# EAGLE board 365nm-LED-board (EAGLE 6.4)
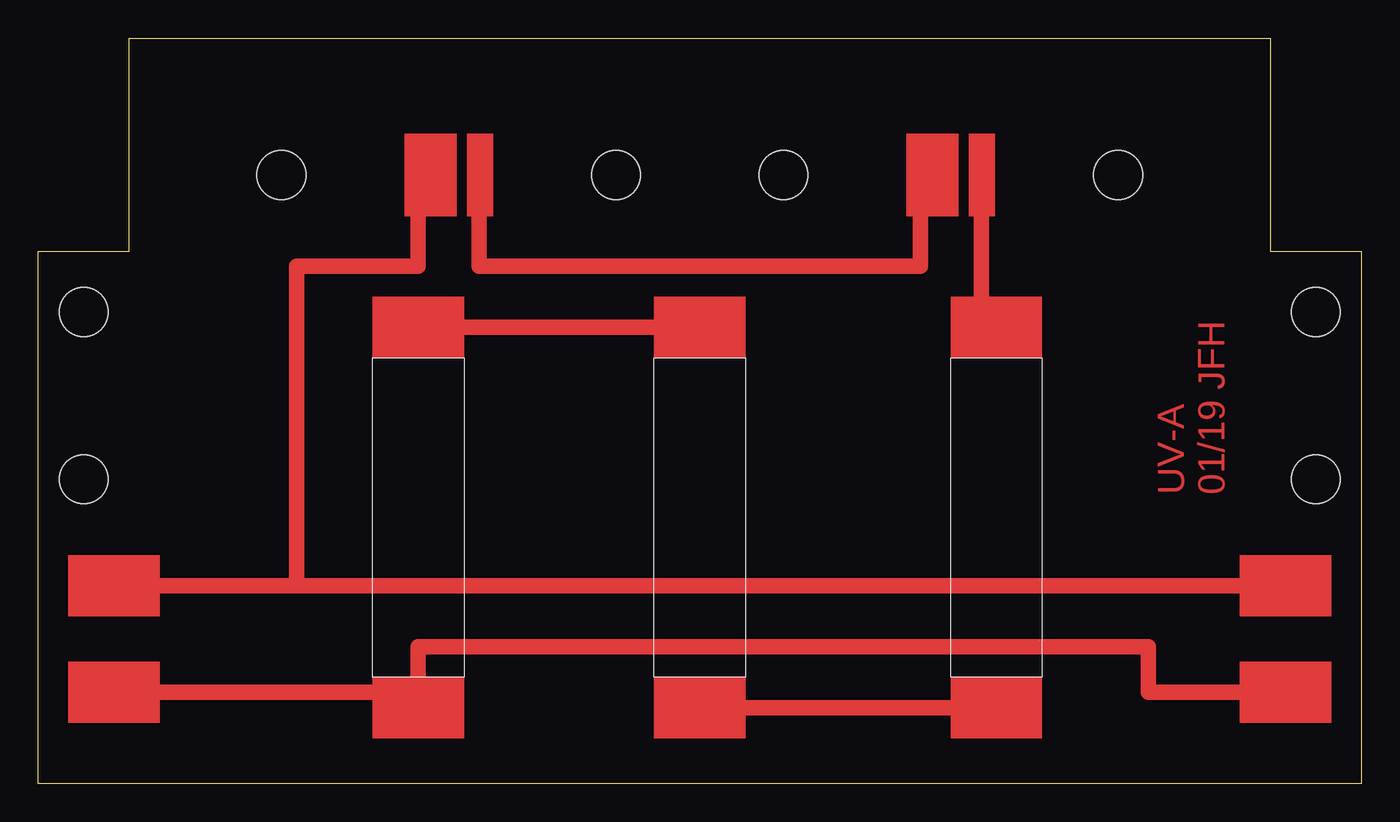
[diagram p0: board, top side]
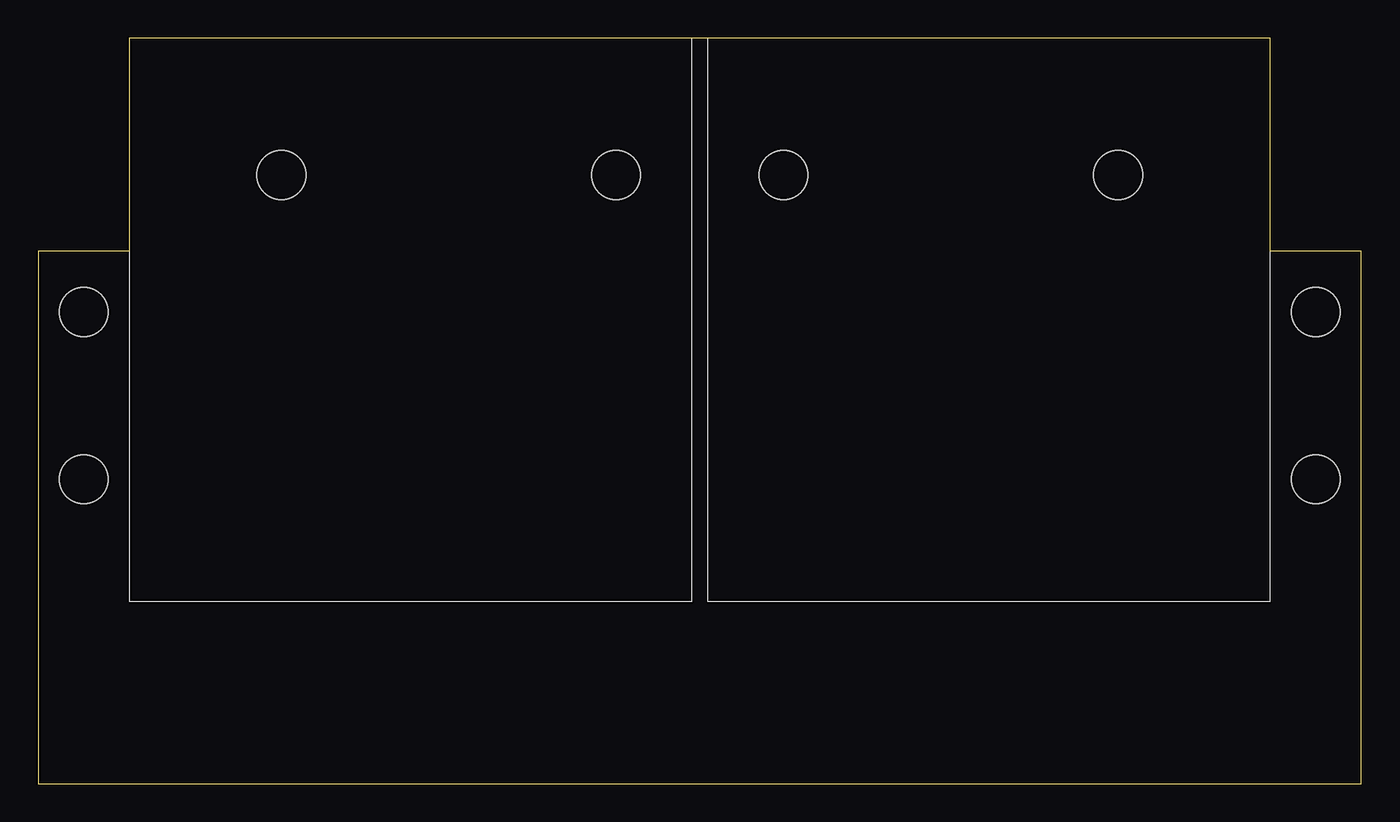
[diagram p1: board, bottom side, seen from below]

Size 87 x 49 mm. Coordinates in mm from the lower left corner, seen from the top.
Outline: 0,0 0,35 6,35 6,49 81,49 81,35 87,35 87,0 0,0
Copper layers (1*16): Top 0.035mm / dielectric 1.5mm / Bottom 0.035mm
Design rules "default": minimum track width 10mil, minimum drill 24mil, track to track 8mil, track to pad 8mil, pad to pad 8mil, via to via 8mil, smd to smd 8mil, copper to edge 40mil, drill to drill 8mil, minimum pad ring 10mil, minimum via ring 8mil, stop-mask expansion 4mil, vias tented up to drill 0mil, thermal gap 10mil
Holes 3.2 mm at 38,40 16,40 49,40 71,40 84,31 84,20 3,20 3,31

## Placement (x,y rotation side)
E$3  [LEDPKG]  60,40 0 top
E$5  [LEDPKG]  27,40 0 top

## Library data of the parts
E$3 E$5 = led

## Tracks (layer width: path | path; a pad name or v marks a point on that pad's centre or on a via)
S$1
  Top 1.016: 29,40 29,34 58,34 58,41
S$2
  Top 1.016: 25,41 25,34 17,34 17,13 | 17,13 25,13 82,13 | 17,13 5,13
S$5
  Top 1.016: 62,42 62,29
S$6  (via drill 0.6)
  other vias: 3,31
S$7  (via drill 0.6)
  other vias: 3,20
S$8  (via drill 0.6)
  other vias: 84,20
S$9  (via drill 0.6)
  other vias: 84,31
S$10  (via drill 0.6)
  other vias: 16,40
S$11  (via drill 0.6)
  other vias: 38,40
S$12  (via drill 0.6)
  other vias: 49,40
S$13  (via drill 0.6)
  other vias: 71,40
S$18
  Top 1.016: 25,30 44,30
S$19
  Top 1.016: 63,5 43,5
S$20
  Top 1.016: 6,6 25,6
S$21
  Top 1.016: 81,6 73,6 73,9 25,9 25,5
(copper drawn outside any net)
  shapes: Top area x10

## Text on the board
Top: UV-A / 01/19 JFH